# Altium PCB Jupiter PCB.PcbDoc (part 2 of 2)
Units mm, origin at the board's own origin, x right, y up, seen from the top; angles counter-clockwise.
Board outline 17.4 x 70.23 mm, 4 copper layers (Top Layer (SIG), Layer 1 (GND), Layer 2 (PWR), Bottom Layer (SIG)), stack 1.603 mm thick; 59 components, 32 nets, 227 pads, 175 vias.
Unrouted connection lines stored in the file: 2.
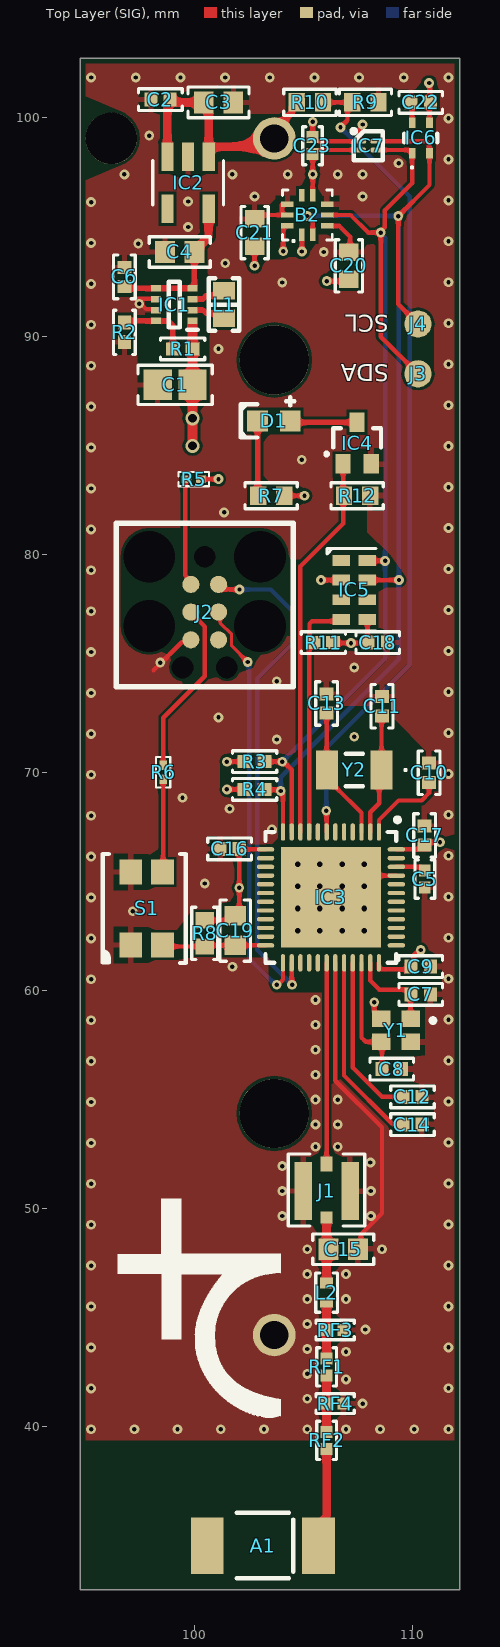
[diagram p0: Top Layer (SIG) view]

## Via types
v1: diameter 0.45, hole 0.2, Top Layer (SIG) to Bottom Layer (SIG), 173 vias
v2: diameter 0.65, hole 0.4, Top Layer (SIG) to Bottom Layer (SIG), 2 vias

## Nets (pads, with @x,y where several pads share a name; then routed paths per layer and width w, separated by ;. In a path a pad name is that pad's centre, name@x,y a point inside that pad or via, vN(x,y) a via of type N, cw(c..) or ccw(c..) an arc to the next point about the centre after c; other vN are vias at no path point) (continued)
pads on no net: A1.G B1. B2.7 IC2.4 IC3.4 IC3.5 IC3.6 IC3.8 IC3.14 IC3.15 IC3.16 IC3.17 IC3.18 IC3.19 IC3.20 IC3.21 IC3.22 IC3.23 IC3.27 IC3.28 IC3.29 IC3.37 IC3.38 IC3.39 IC3.40 IC3.41 IC3.42 IC3.43 IC3.44 IC3.47 IC5.1 IC5.3 IC5.6 J2.6 J2.NC J2.S

## Polygon pours and split planes (outlines as drawn)
GND on Layer 1 (GND) "GND_L02_P001" (solid, pour order 1): 94.742,32.512 94.742,102.743 112.141,102.743 112.141,32.512
V_REG_3V on Layer 2 (PWR) "V_REG_3V_L03_P002" (solid, pour order 2): 94.742,32.512 94.742,102.743 112.141,102.743 112.141,32.512
GND on Top Layer (SIG) "GND_L01_P000" (solid, remove dead copper, pour order 0): 94.742,32.512 94.742,102.743 112.141,102.743 112.141,32.512
GND on Bottom Layer (SIG) "GND_L04_P003" (solid, remove dead copper, pour order 3): 94.742,32.512 94.742,102.743 112.141,102.743 112.141,32.512

## Other copper
Top Layer (SIG):
  pour cut-out: 100.566,93.226 100.566,92.745 100.719,92.592 100.711,92.584 100.711,92.202 100.33,92.202 100.149,92.383 100.149,93.195 100.235,93.281
  pour cut-out: 97.443,91.804 97.437,91.809 96.325,91.809 96.325,91.869 96.404,91.948 97.536,91.948
  pour cut-out: 111.04,99.402 111.04,98.756 110.797,98.756 110.744,98.809 110.744,99.314
  pour cut-out: 94.742,102.743 94.742,39.37 94.996,39.37 94.996,102.743
  pour cut-out: 112.141,102.743 94.742,102.743 94.742,102.489 112.141,102.489
  pour cut-out: 112.141,39.37 111.887,39.37 111.887,102.743 112.141,102.743
  pour cut-out: 107.915,81.998 107.915,81.009 108.915,80.009 106.065,80.009 106.065,80.309 105.915,80.459 106.807,81.351 106.807,82.077
  pour cut-out: 99.167,61.377 99.89,61.511 99.89,63.711 99.167,62.781
  pour cut-out: 97.328,89.141 97.394,89.075 97.394,88.711 99.044,88.711 98.933,88.822 98.933,90.805 97.189,90.805 97.074,90.69
  pour cut-out: 100.675,88.584 100.675,90.966 100.596,91.045 100.483,90.932 99.949,90.932 99.949,88.883 100.248,88.584
  pour cut-out: 100.719,90.288 100.717,90.29 99.898,90.29 99.898,90.69 99.91,90.678 100.711,90.678
  pour cut-out: 96.827,100.203 96.835,97.916 94.742,97.028 94.742,101.092
  pour cut-out: 109.362,78.454 108.236,78.454 108.204,78.486 108.529,78.811 108.727,78.811
  pour cut-out: 109.693,78.95 108.981,79.943 108.981,79.663 108.981,79.898 108.458,79.375 108.712,79.121 108.712,78.994
  pour cut-out: 97.348,93.704 97.935,93.704 97.935,93.182 97.964,93.153 97.95,93.139 97.95,92.945 97.744,92.945 97.644,92.844 97.523,92.965 97.173,92.965 97.173,93.267 97.225,93.319
  pour cut-out: 97.348,93.023 97.859,93.023 97.936,93.1 99.465,93.1 99.727,92.839 99.727,92.467 98.605,92.467 98.56,92.422 97.314,92.422 97.131,92.604
  pour cut-out: 102.492,100.161 104.033,100.161 103.927,100.055 103.927,98.009 101.162,98.009 100.645,98.527 100.645,100.236
  pour cut-out: 107,100.111 107,99.248 107.188,99.06 109.594,99.06 109.613,99.079 109.559,99.133 109.559,100.115 109.363,100.311 109.154,100.102 107.613,100.102
  pour cut-out: 106.357,93.189 106.357,92.906 106.426,92.837 106.586,92.997 106.586,93.218
  pour cut-out: 97.917,81.209 102.997,81.209 102.997,79.121 98.171,79.121 97.917,79.375
  pour cut-out: 99.06,79.375 101.854,79.375 101.854,75.311 99.06,75.311
  pour cut-out: 102.481,61.486 103.469,61.486 103.675,61.692 103.537,61.831 102.481,61.831
  pour cut-out: 103.4,60.255 103.378,60.277 103.378,61.849 104.013,61.849 104.045,61.817 104.045,60.674
  pour cut-out: 103.759,59.896 105.87,59.896 105.918,59.944 105.918,60.833 104.902,60.833
  pour cut-out: 108.613,98.064 108.613,99.39 107.75,99.39 107.823,99.317 107.823,98.679 107.676,98.679 107.287,98.29 107.287,98.064
  pour cut-out: 110.994,90.551 110.969,90.525 110.969,88.069 110.178,88.069 109.855,88.392 109.855,90.678
  pour cut-out: 110.772,90.015 110.772,88.801 110.01,88.801 109.855,88.646 108.531,89.97 108.531,91.64 108.585,91.694 108.854,91.425 109.362,91.425
  pour cut-out: 110.4,62.083 110.4,64.516 109.982,64.516 109.601,64.135 109.601,62.23
  pour cut-out: 106.276,71.131 106.276,72.822 106.492,73.038 108.905,73.038 109.032,72.911 109.159,72.911 109.159,72.429 110.617,70.971
  pour cut-out: 103.32,93.59 103.382,93.528 104.057,93.528 104.057,94.47 103.815,94.713 103.447,94.713 103.32,94.384
  pour cut-out: 106.276,71.131 110.01,71.131 110.17,70.971 110.17,69.977 109.528,69.977 107.896,68.345 107.765,68.345 106.692,69.419
  pour cut-out: 105.807,80.08 105.076,79.349 105.076,76.733 105.234,76.575 105.553,76.575 106.188,77.209 106.188,79.922
  pour cut-out: 96.591,79.883 96.591,76.708 99.314,76.708 99.314,79.756
  pour cut-out: 101.854,79.375 101.91,79.431 104.538,79.431 104.614,79.355 104.614,77.236 104.308,77.236 104.233,77.16 103.612,77.78 102.042,77.78 101.854,77.968
  pour cut-out: 109.972,68.889 109.972,66.899 109.748,66.675 108.458,66.675 108.458,67.945 109.168,68.655
  pour cut-out: 101.139,70.485 101.139,69.215 103.869,69.215 103.993,69.091 104.08,69.177 104.08,70.485
  pour cut-out: 111.073,65.236 111.044,65.265 111.044,66.267 110.844,66.267 110.744,66.167 110.946,65.965 110.946,65.236
  pour cut-out: 110.574,58.27 110.574,59.352 110.49,59.436 110.371,59.317 110.363,59.317 110.363,58.354 110.447,58.27
  pour cut-out: 109.868,53.274 109.868,53.401 109.029,53.401 108.982,53.448 108.919,53.274
  pour cut-out: 109.093,69.977 110.244,69.977 110.244,69.916 110.344,69.816 110.344,68.834 109.093,68.834
  pour cut-out: 94.742,39.37 94.742,32.512 112.141,32.512 112.141,39.37
Layer 1 (GND):
  pour cut-out: 112.141,39.37 111.887,39.37 111.887,102.743 112.141,102.743
  pour cut-out: 112.141,102.743 94.742,102.743 94.742,102.489 112.141,102.489
  pour cut-out: 94.742,102.743 94.742,39.37 94.996,39.37 94.996,102.743
  pour cut-out: 96.827,100.203 96.835,97.916 94.742,97.028 94.742,101.092
  pour cut-out: 99.06,79.375 101.854,79.375 101.854,75.311 99.06,75.311
  pour cut-out: 99.06,79.375 101.854,79.375 101.854,75.311 99.06,75.311
  pour cut-out: 94.742,39.37 94.742,32.512 112.141,32.512 112.141,39.37
Layer 2 (PWR):
  pour cut-out: 94.742,102.743 94.742,39.37 94.996,39.37 94.996,102.743
  pour cut-out: 112.141,102.743 94.742,102.743 94.742,102.489 112.141,102.489
  pour cut-out: 112.141,39.37 111.887,39.37 111.887,102.743 112.141,102.743
  pour cut-out: 96.827,100.203 96.835,97.916 94.742,97.028 94.742,101.092
  pour cut-out: 99.06,79.375 101.854,79.375 101.854,75.311 99.06,75.311
  pour cut-out: 94.742,39.37 94.742,32.512 112.141,32.512 112.141,39.37
Bottom Layer (SIG):
  pour cut-out: 112.141,39.37 111.887,39.37 111.887,102.743 112.141,102.743
  pour cut-out: 112.141,102.743 94.742,102.743 94.742,102.489 112.141,102.489
  pour cut-out: 94.742,102.743 94.742,39.37 94.996,39.37 94.996,102.743
  pour cut-out: 96.827,100.203 96.835,97.916 94.742,97.028 94.742,101.092
  pour cut-out: 99.06,79.375 101.854,79.375 101.854,75.311 99.06,75.311
  pour cut-out: 94.742,39.37 94.742,32.512 112.141,32.512 112.141,39.37

## Silkscreen, mask and mechanical layers (free items; w line width, h text height)
Top Overlay:
  region: 2005 vertices and 0 holes, not listed, extent 96.465,40.415 103.944,50.453
  text "SCL" at 108.89,90.983 h0.76 r180
  text "SDA" at 108.89,88.697 h0.76 r180
Board:
  the board outline again, w0.127

## Dimensions
112.141,32.512 to 112.141,102.743 on Assembly Notes
94.742,32.512 to 112.141,32.512 on Assembly Notes

## Text inside footprints (layer, text, board x,y; h text height)
B1: Mechanical 13 "-" at 103.146,41.428 h1.27 r270; Mechanical 13 "+" at 103.046,101.428 h1.27 r270; Bottom Overlay "-" at 103.146,41.428 h1.27 r270; Bottom Overlay "+" at 103.046,101.428 h1.27 r270